# Altium PCB Filter_v2.PcbDoc
Units mil, origin at the board's own origin, x right, y up, seen from the top; angles counter-clockwise.
Board outline 950 x 885 mil, 2 copper layers (Top Layer, Bottom Layer); 29 components, 17 nets, 75 pads, 19 vias.
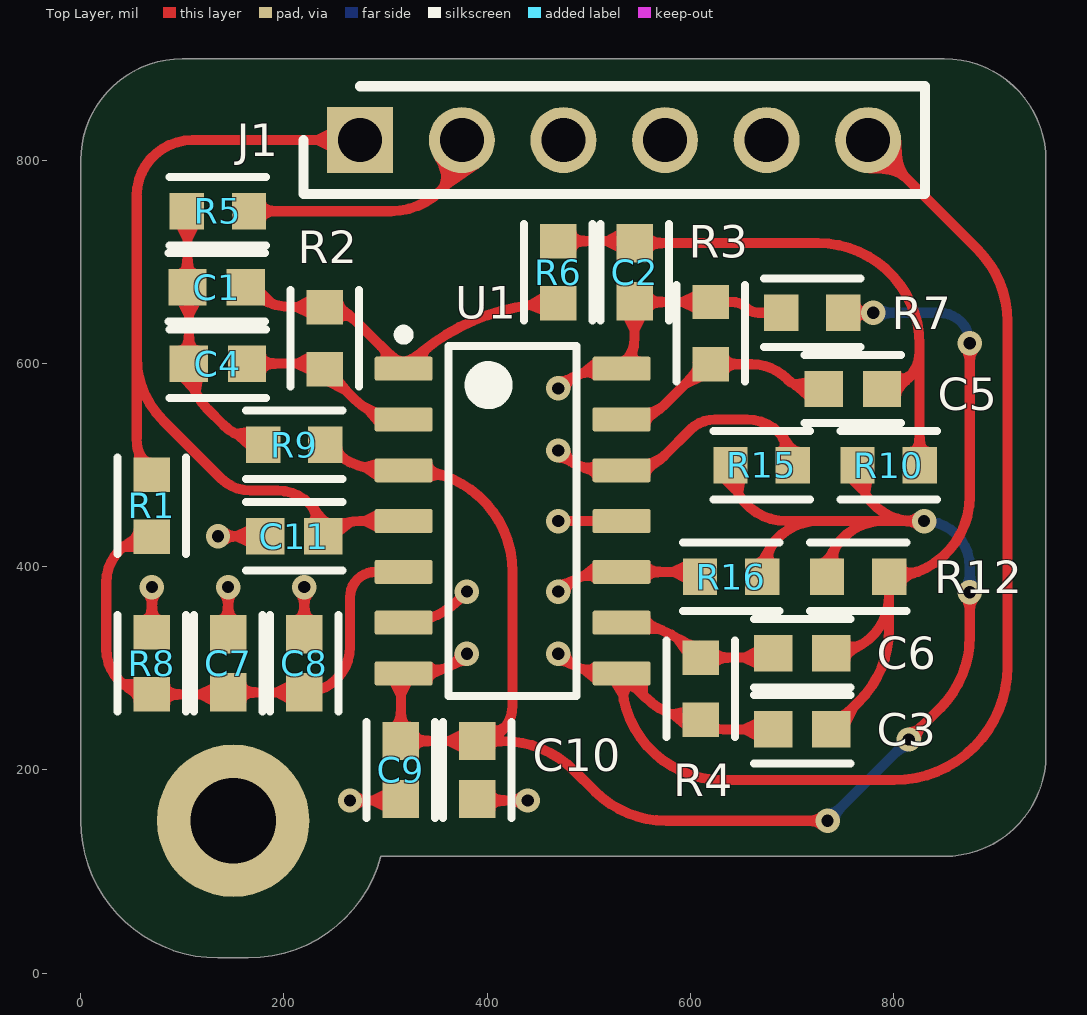
[diagram p0: Top Layer view]
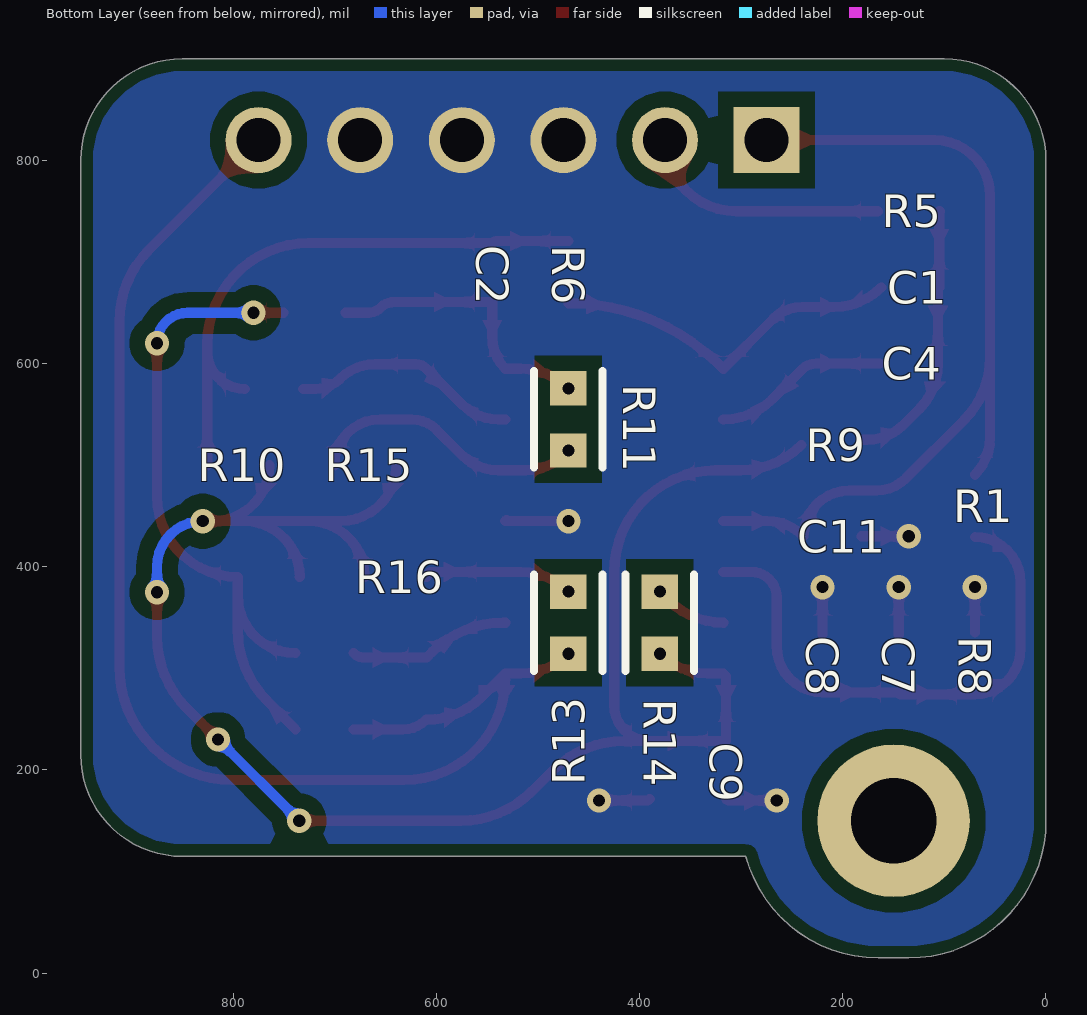
[diagram p1: Bottom Layer view, seen from below]
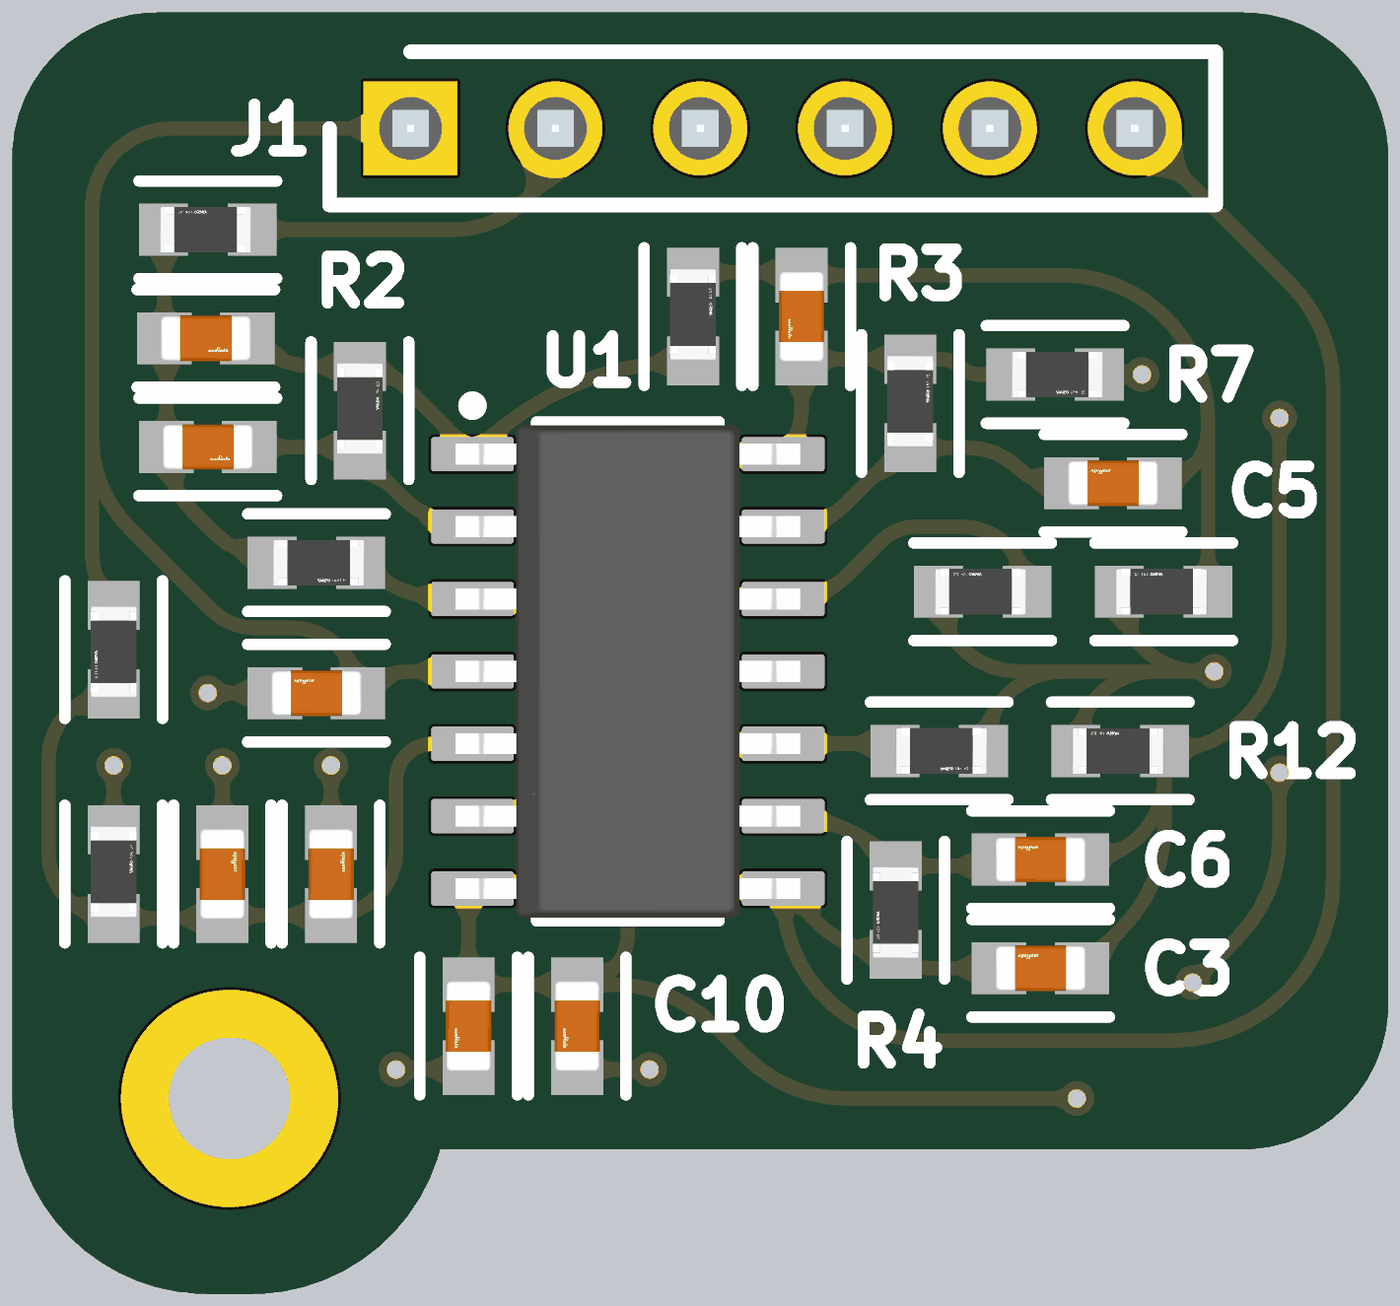
[diagram p2: 3D render of the assembled board from above, using the file's embedded part models]
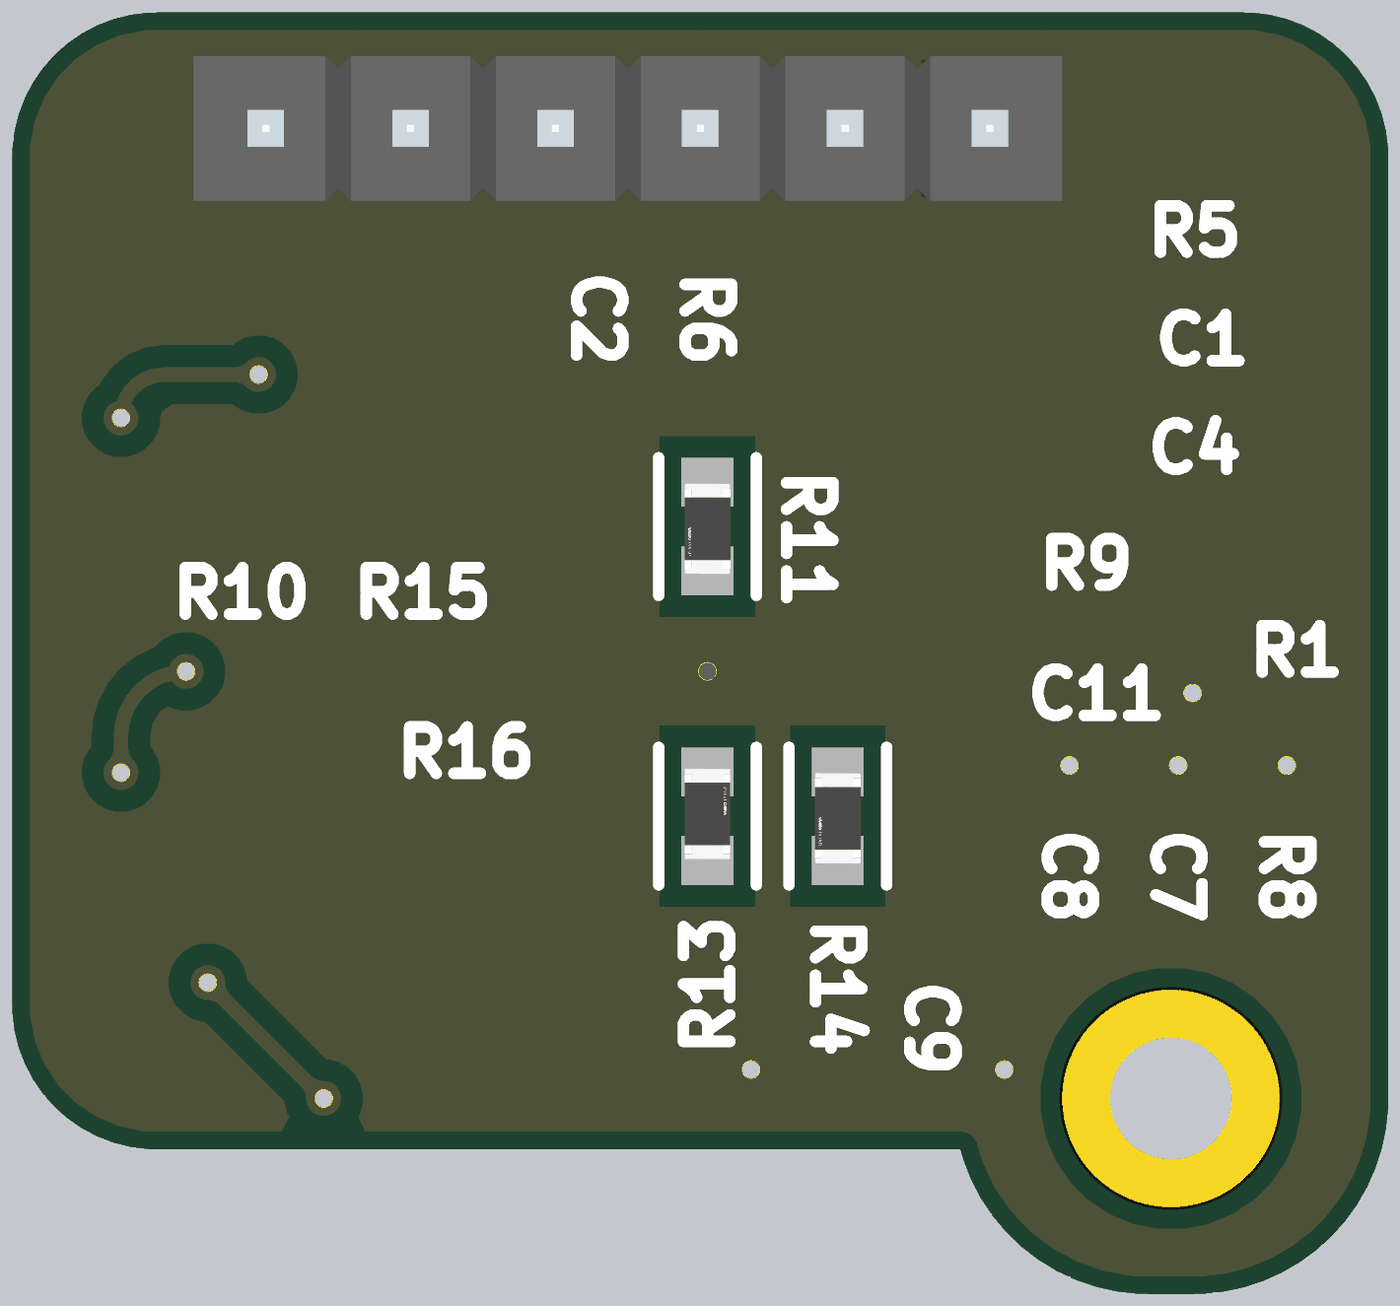
[diagram p3: 3D render of the assembled board from below, using the file's embedded part models]

## Layer stack, top to bottom
Top Solder: solder mask 0.4, Solder Resist, Dk 3.5
Top Layer: signal copper 1.4
Dielectric 1: dielectric 12.6, FR-4, Dk 4.8
Bottom Layer: signal copper 1.4
Bottom Solder: solder mask 0.4, Solder Resist, Dk 3.5

## Board outline
335,115.03 295.36,114.9 cw(c165,150) 165,15 135,15 cw(c135,150) 0,150 0,800 cw(c100,800) 100,900 850,900 cw(c850,800) 950,800 950,215 cw(c850,215) 850,115

## Design rules (kind name [scope] priority, off if disabled: settings)
BoardOutlineClearance [All] p1: gap=12 ignorepadtopadclearanceinfootprint=FALSE
Clearance [All] p1: gap=15 ignorepadtopadclearanceinfootprint=TRUE
PolygonConnect PolygonConnect_1 [OnLayer('Bottom Layer')] p1: connectstyle=Direct reliefconductorwidth=10 reliefentries=4 polygonreliefangle="90 Angle" airgapwidth=10
PolygonConnect [All] p2: thpad.connectstyle=Relief thpad.reliefconductorwidth=10 thpad.reliefentries=4 thpad.polygonreliefangle="90 Angle" thpad.airgapwidth=10 smdpad.connectstyle=Relief smdpad.reliefconductorwidth=10 smdpad.reliefentries=4 smdpad.polygonreliefangle="90 Angle" smdpad.airgapwidth=10 via.connectstyle=Direct via.reliefconductorwidth=10 via.reliefentries=4 via.polygonreliefangle="90 Angle" via.airgapwidth=10
RoutingVias [All] p1: holewidth=24 width=48 viastyle="Through Hole" minholewidth=12 minwidth=24 maxholewidth=48 maxwidth=96
SolderMaskExpansion SolderMaskExpansion_1 [IsVia] p1: expansion=4 istentingtop=TRUE
SolderMaskExpansion [All] p2: expansion=1.97 istentingtop=FALSE
SupplyNets "Schematic Supply Nets_1" [InNet('+3V3')] p1: voltage=0.000
SupplyNets "Schematic Supply Nets" [InNet('GND')] p2: voltage=0.000
Width [All] p1: maxlimit=40 minlimit=10 preferedwidth=20
30 further rules are at their usual default settings.

## Components (designator, comment, footprint, x,y, rotation, side; value= is the part's Value field where it differs from the comment)
C1 "360pF" FP-GCM188-0_1-IPC_B 133.61,675 r0 top
C2 "330pF" FP-GCM188-0_1-IPC_B 545,690 r270 top
C3 "360pF" FP-GCM188-0_1-IPC_B 710,240 r180 top
C4 "360pF" FP-GCM188-0_1-IPC_B 135,600 r0 top
C5 "330pF" FP-GCM188-0_1-IPC_B 760,575 r180 top
C6 "360pF" FP-GCM188-0_1-IPC_B 710,315 r180 top
C7 "10uF" FP-GCM188-0_1-IPC_B 145,305 r90 top
C8 "100nF" FP-GCM188-0_1-IPC_B 220,305 r90 top
C9 "10uF" FP-GCM188-0_1-IPC_B 315,200 r270 top
C10 "100nF" FP-GCM188-0_1-IPC_B 390,200 r270 top
C11 "100nF" FP-GCM188-0_1-IPC_B 210,430 r180 top
J1 "61300611121" 61300611121-Footprint-1 275,820 r0 top
R1 "10k" FP-RT0603-IPC_B 70,460 r270 top value=10kR
R2 "165k" FP-RT0603-IPC_B 240,625 r90 top value=165kR
R3 "102k" FP-RT0603-IPC_B 620,630 r90 top value=102kR
R4 "102k" FP-RT0603-IPC_B 610,280 r270 top value=102kR
R5 "82.5k" FP-RT0603-IPC_B 135,750 r180 top value=82.5kR
R6 "80.6k" FP-RT0603-IPC_B 470,690 r90 top value=80.6kR
R7 "80.6k" FP-RT0603-IPC_B 720,650 r0 top value=80.6kR
R8 "10k" FP-RT0603-IPC_B 70,305 r90 top value=10kR
R9 "576R" FP-RT0603-IPC_B 210,520 r0 top
R10 "1.05k" FP-RT0603-IPC_B 795,500 r180 top value=1.05kR
R11 "14.3k" FP-RT0603-IPC_B 470,545 r270 bottom value=14.3kR
R12 "1.05k" FP-RT0603-IPC_B 765,390 r180 top value=1.05kR
R13 "14.7k" FP-RT0603-IPC_B 470,345 r90 bottom value=14.7kR
R14 "4.99k" FP-RT0603-IPC_B 380,345 r270 bottom value=4.99kR
R15 "154R" FP-RT0603-IPC_B 670,500 r180 top
R16 "158R" FP-RT0603-IPC_B 640,390 r0 top
U1 "TL974IDR" D0014A_N 425,445 r0 top

## Footprints (in the part's own frame and the unit in brackets; to place one, negate y for a bottom-side part, rotate by r counter-clockwise, add the part's x,y. Pads: shape width x height; smd on the part's side, far side on the other; paste and mask are expansions set on the pad)
61300611121-Footprint-1 [mm]
  rect 1.65x1.65 hole 1.1: 1(0,0)
  round 1.65 hole 1.1: 2(2.54,0) 3(5.08,0) 4(7.62,0) 5(10.16,0) 6(12.7,0)
  silkscreen extent -1.42,-1.35 14.12,1.35, body extent -1.27,-1.27 13.97,1.27, height 2.74
D0014A_N [mm] "SOIC, 14-Leads, Body 8.75x4mm, Pitch 1.27mm, IPC Medium Density"
  rrect17% 1.45x0.6 smd: 1(-2.725,3.81) 2(-2.725,2.54) 3(-2.725,1.27) 4(-2.725,0) 5(-2.725,-1.27) 6(-2.725,-2.54) 7(-2.725,-3.81) 8(2.725,-3.81) 9(2.725,-2.54) 10(2.725,-1.27) 11(2.725,0) 12(2.725,1.27) 13(2.725,2.54) 14(2.725,3.81)
  silkscreen extent -2.85,-4.38 1.6,4.78, body extent -3.02,-4.32 3.02,4.32, height 1.59
FP-GCM188-0_1-IPC_B [mil]
  rect 37.74x35.91 smd paste+0 mask+0: 1(-28.61,0) 2(28.61,0)
  silkscreen extent -47,-34 47,34, body extent -57,-28 57,28, height 10
FP-RT0603-IPC_B [mil]
  rect 33.81x35.91 smd paste+0 mask+0: 1(-30.58,0) 2(30.58,0)
  silkscreen extent -47,-34 47,34, body extent -57,-28 57,28, height 10

## Part data
C1 C3 C4 C6: library part CMP-00016-1, "Ceramic Capacitor, Multilayer, Ceramic, 100V, 1% +Tol, 1% -Tol, C0G, 30ppm/Cel TC, 0.00036uF, Surface Mount, 0603", Capacitor Type=Ceramic, Case/Package=0603, Max Operating Temperature=125°C, Min Operating Temperature=-55°C, Package Shape=Rectangular, Rated DC Voltage (URdc)=100V, Temperature Characteristics Code=C0G, Tolerance  (fill in as +-)=1%, Dielectric Material=Ceramic, Mounting Technology="Surface Mount", Multilayer=Yes, Packaging="Tape and Reel", Pins=2, Reach SVHC Compliant=Yes, Reference Standard=AEC-Q200, RoHS Compliant=Yes, Termination=Wraparound, Tolerance (fill in as +-)=1%
C2 C5: library part CMP-00012-1, "Ceramic Capacitor, Multilayer, Ceramic, 50V, 1% +Tol, 1% -Tol, C0G, -/+30ppm/Cel TC, 0.00033uF, Surface Mount, 0603", Capacitor Type=Ceramic, Case/Package=0603, Manufacturer Series=GRM18, Max Operating Temperature=125°C, Min Operating Temperature=-55°C, Package Shape=Rectangular, Rated DC Voltage (URdc)=50V, Temperature Characteristics Code=C0G, Tolerance  (fill in as +-)=1%, Dielectric Material=Ceramic, JESD-609 Code=e3, Mounting Technology="Surface Mount", Multilayer=Yes, Packaging="Tape and Reel", Pins=2, Reach SVHC Compliant=Yes, RoHS Compliant=Yes, Terminal Finish=Tin, Termination=Wraparound, Tolerance (fill in as +-)=1%
C7 C9: library part CMP-00036-2, "25V 10uF Ceramic Capacitor, Multilayer, Ceramic, 25V, 10% +Tol, 10% -Tol, X5R, 15% TC, 10uF, Surface Mount, 0603", Capacitor Type=Ceramic, Case/Package=0603, Max Operating Temperature=85°C, Min Operating Temperature=-55°C, Package Shape=Rectangular, Rated DC Voltage (URdc)=25V, Temperature Characteristics Code=X5R, Tolerance  (fill in as +-)=10%, Dielectric Material=Ceramic, JESD-609 Code=e3, Mounting Technology="Surface Mount", Multilayer=Yes, Packaging="Tape and Reel", Pins=2, Reach SVHC Compliant=Yes, RoHS Compliant=Yes, Terminal Finish=Nickel, Termination=Wraparound, Tolerance (fill in as +-)=10%
C8 C10 C11: library part CMP-00033-2, "50V 100nF Ceramic Capacitor, Multilayer, Ceramic, 50V, 10% +Tol, 10% -Tol, X7R, 15% TC, 0.1uF, Surface Mount, 0603", Capacitor Type=Ceramic, Case/Package=0603, Max Operating Temperature=125°C, Min Operating Temperature=-55°C, Package Shape=Rectangular, Package Style=SMTMeter, Rated DC Voltage (URdc)=50V, Temperature Characteristics Code=X7R, Tolerance  (fill in as +-)=10%, Dielectric Material=Ceramic, Height=0.8mm, JESD-609 Code=e3, Length=1.6mm, Mounting Technology="Surface Mount", Multilayer=Yes, Packaging="Tape and Reel", Pins=2, Reach SVHC Compliant=Yes, RoHS Compliant=Yes, Terminal Finish=Nickel, Termination=Wraparound, Tolerance (fill in as +-)=10%, Width=0.8mm
J1: library part CMP-00041-2, "6P Single Row 2.54mm Wurth Elektronik Header Pin (inverted 3D model)", Contact Resistance=20mR, Dielectric Withstanding Voltage (AC)=500V, Insulation Color=Black, Insulation Resistance=1GR, Max Operating Temperature=125°C, Min Operating Temperature=-40°C, Rated Current (Signal)=3A, Body Breadth=0.1inch, Body Depth=0.1inch, Body Length=0.6inch, Body/Shell Style=PLUG, Connector Type="BOARD CONNECTOR", Contact Finish - Mating=GOLD, Contact Finish - Termination="Gold (Au) - with Nickel (Ni) barrier", Contact Gender=Male, Contact Material="Copper Alloy", Contact Pattern=RECTANGULAR, Contact Style="SQ PIN-SKT", Insulation Material=Polybutylene, JESD-609 Code=e4, Mating Contact Pitch=0.1inch, Mounting Option 1=LOCKING, Mounting Style=STRAIGHT, Mounting Technology=Board, Number Of Connectors=1, Number of Contacts=6, Number of Rows Loaded=1, PCB Contact Pattern=RECTANGULAR, Reach SVHC Compliant=Yes, Reference Standard=UL, Reliability=COMMERCIAL, RoHS Compliant=Yes, System=Connector, Terminal Length=0.118inch, Terminal Pitch=2.54mm, Termination=Solder
R1 R8: library part CMP-00035-1, "10k 1% Fixed Resistor, Metal Glaze/thick Film, 0.1W, 10000ohm, 75V, 1% +/-Tol, 100ppm/Cel, Surface Mount, 0603", Case/Package=0603, Max Operating Temperature=155°C, Min Operating Temperature=-55°C, Package Height=0.45mm, Package Length=1.6mm, Package Shape=Rectangular, Package Width=0.8mm, Power=100mW, Rated Temperature=70°C, Resistor Type="FIXED RESISTOR", Temperature Coefficient (ppm/Cel)=100, Tolerance=1%, Working Voltage=75V, Additional Feature="LASER TRIMMABLE", Construction=Chip, JESD-609 Code=e3, Mounting Technology="Surface Mount", Packaging="Tape and Reel", Pins=2, Reach SVHC Compliant=Yes, RoHS Compliant=Yes, Technology="METAL GLAZE/THICK FILM", Terminal Finish=Nickel, Termination=Wraparound
R2: library part CMP-00023-1, "165k Fixed Resistor, Thin Film, 0.1W, 165000ohm, 75V, 0.1% +/-Tol, 25ppm/Cel, Surface Mount, 0603", Case/Package=0603, Max Operating Temperature=155°C, Min Operating Temperature=-55°C, Package Height=0.45mm, Package Length=1.6mm, Package Width=0.8mm, Power=100mW, Rated Temperature=70°C, Resistor Type="FIXED RESISTOR", Temperature Coefficient (ppm/Cel)=25, Tolerance=0.1%, Working Voltage=75V, Construction=Chip, Mounting Technology="Surface Mount", Packaging="Tape and Reel", Pins=2, Reach SVHC Compliant=Yes, RoHS Compliant=Yes, Technology="THIN FILM", Termination=Wraparound
R3 R4: library part CMP-00011-2, "102k Fixed Resistor, Thin Film, 0.1W, 102000ohm, 75V, 0.1% +/-Tol, 25ppm/Cel, Surface Mount, 0603", Case/Package=0603, Max Operating Temperature=155°C, Min Operating Temperature=-55°C, Package Height=0.45mm, Package Length=1.6mm, Package Width=0.8mm, Power=100mW, Rated Temperature=70°C, Resistor Type="FIXED RESISTOR", Temperature Coefficient (ppm/Cel)=25, Tolerance=0.1%, Working Voltage=75V, Construction=Chip, Mounting Technology="Surface Mount", Packaging="Tape and Reel", Pins=2, Reach SVHC Compliant=Yes, RoHS Compliant=Yes, Technology="THIN FILM", Termination=Wraparound
R5: library part CMP-00022-2, "82.5k Fixed Resistor, Thin Film, 0.1W, 82500ohm, 75V, 0.1% +/-Tol, 25ppm/Cel, Surface Mount, 0603", Case/Package=0603, Max Operating Temperature=155°C, Min Operating Temperature=-55°C, Package Height=0.45mm, Package Length=1.6mm, Package Width=0.8mm, Power=100mW, Rated Temperature=70°C, Resistor Type="FIXED RESISTOR", Temperature Coefficient (ppm/Cel)=25, Tolerance=0.1%, Working Voltage=75V, Construction=Chip, Mounting Technology="Surface Mount", Packaging="Tape and Reel", Pins=2, Reach SVHC Compliant=Yes, RoHS Compliant=Yes, Technology="THIN FILM", Termination=Wraparound
R6 R7: library part CMP-00025-2, "80.6k Fixed Resistor, Thin Film, 0.1W, 80600ohm, 75V, 0.1% +/-Tol, 25ppm/Cel, Surface Mount, 0603", Case/Package=0603, Max Operating Temperature=155°C, Min Operating Temperature=-55°C, Package Height=0.45mm, Package Length=1.6mm, Package Width=0.8mm, Power=100mW, Rated Temperature=70°C, Resistor Type="FIXED RESISTOR", Temperature Coefficient (ppm/Cel)=25, Tolerance=0.1%, Working Voltage=75V, Construction=Chip, Mounting Technology="Surface Mount", Packaging="Tape and Reel", Pins=2, Reach SVHC Compliant=Yes, RoHS Compliant=Yes, Technology="THIN FILM", Termination=Wraparound
R9: library part CMP-00024-2, "576R Fixed Resistor, Thin Film, 0.1W, 576ohm, 75V, 0.1% +/-Tol, 25ppm/Cel, Surface Mount, 0603", Case/Package=0603, Max Operating Temperature=155°C, Min Operating Temperature=-55°C, Package Height=0.45mm, Package Length=1.6mm, Package Width=0.8mm, Power=100mW, Rated Temperature=70°C, Resistor Type="FIXED RESISTOR", Temperature Coefficient (ppm/Cel)=25, Tolerance=0.1%, Working Voltage=75V, Construction=Chip, Mounting Technology="Surface Mount", Packaging="Tape and Reel", Pins=2, Reach SVHC Compliant=Yes, RoHS Compliant=Yes, Technology="THIN FILM", Termination=Wraparound
R10 R12: library part CMP-00026-2, "1.05k Fixed Resistor, Thin Film, 0.1W, 1050ohm, 75V, 0.1% +/-Tol, 25ppm/Cel, Surface Mount, 0603", Case/Package=0603, Max Operating Temperature=155°C, Min Operating Temperature=-55°C, Package Height=0.45mm, Package Length=1.6mm, Package Width=0.8mm, Power=100mW, Rated Temperature=70°C, Resistor Type="FIXED RESISTOR", Temperature Coefficient (ppm/Cel)=25, Tolerance=0.1%, Working Voltage=75V, Construction=Chip, Mounting Technology="Surface Mount", Packaging="Tape and Reel", Pins=2, Reach SVHC Compliant=Yes, RoHS Compliant=Yes, Technology="THIN FILM", Termination=Wraparound
R11: library part CMP-00029-1, "14.3k Fixed Resistor, Thin Film, 0.1W, 14300ohm, 75V, 0.1% +/-Tol, 25ppm/Cel, Surface Mount, 0603", Case/Package=0603, Max Operating Temperature=155°C, Min Operating Temperature=-55°C, Package Height=0.45mm, Package Length=1.6mm, Package Width=0.8mm, Power=100mW, Rated Temperature=70°C, Resistor Type="FIXED RESISTOR", Temperature Coefficient (ppm/Cel)=25, Tolerance=0.1%, Working Voltage=75V, Construction=Chip, Mounting Technology="Surface Mount", Packaging="Tape and Reel", Pins=2, Reach SVHC Compliant=Yes, RoHS Compliant=Yes, Technology="THIN FILM", Termination=Wraparound
R13: library part CMP-00027-2, "14.7k Fixed Resistor, Thin Film, 0.1W, 14700ohm, 75V, 0.1% +/-Tol, 25ppm/Cel, Surface Mount, 0603", Case/Package=0603, Max Operating Temperature=155°C, Min Operating Temperature=-55°C, Package Height=0.45mm, Package Length=1.6mm, Package Width=0.8mm, Power=100mW, Rated Temperature=70°C, Resistor Type="FIXED RESISTOR", Temperature Coefficient (ppm/Cel)=25, Tolerance=0.1%, Working Voltage=75V, Construction=Chip, Mounting Technology="Surface Mount", Packaging="Tape and Reel", Pins=2, Reach SVHC Compliant=Yes, RoHS Compliant=Yes, Technology="THIN FILM", Termination=Wraparound
R14: library part CMP-00037-1, "4.99k 1% Fixed Resistor, Metal Glaze/thick Film, 0.1W, 4990ohm, 75V, 1% +/-Tol, 100ppm/Cel, Surface Mount, 0603", Case/Package=0603, Max Operating Temperature=155°C, Min Operating Temperature=-55°C, Package Height=0.45mm, Package Length=1.6mm, Package Shape=Rectangular, Package Width=0.8mm, Power=100mW, Rated Temperature=70°C, Resistor Type="FIXED RESISTOR", Temperature Coefficient (ppm/Cel)=100, Tolerance=1%, Working Voltage=75V, Additional Feature="LASER TRIMMABLE", Construction=Chip, JESD-609 Code=e3, Mounting Technology="Surface Mount", Packaging="Tape and Reel", Pins=2, Reach SVHC Compliant=Yes, RoHS Compliant=Yes, Technology="METAL GLAZE/THICK FILM", Terminal Finish=Nickel, Termination=Wraparound
R15: library part CMP-00030-1, "154R Fixed Resistor, Thin Film, 0.1W, 154ohm, 75V, 0.1% +/-Tol, 25ppm/Cel, Surface Mount, 0603", Case/Package=0603, Max Operating Temperature=155°C, Min Operating Temperature=-55°C, Package Height=0.45mm, Package Length=1.6mm, Package Width=0.8mm, Power=100mW, Rated Temperature=70°C, Resistor Type="FIXED RESISTOR", Temperature Coefficient (ppm/Cel)=25, Tolerance=0.1%, Working Voltage=75V, Construction=Chip, Mounting Technology="Surface Mount", Packaging="Tape and Reel", Pins=2, Reach SVHC Compliant=Yes, RoHS Compliant=Yes, Technology="THIN FILM", Termination=Wraparound
R16: library part CMP-00028-2, "158R Fixed Resistor, Thin Film, 0.1W, 158ohm, 75V, 0.1% +/-Tol, 25ppm/Cel, Surface Mount, 0603", Case/Package=0603, Max Operating Temperature=155°C, Min Operating Temperature=-55°C, Package Height=0.45mm, Package Length=1.6mm, Package Width=0.8mm, Power=100mW, Rated Temperature=70°C, Resistor Type="FIXED RESISTOR", Temperature Coefficient (ppm/Cel)=25, Tolerance=0.1%, Working Voltage=75V, Construction=Chip, Mounting Technology="Surface Mount", Packaging="Tape and Reel", Pins=2, Reach SVHC Compliant=Yes, RoHS Compliant=Yes, Technology="THIN FILM", Termination=Wraparound
U1: library part CMP-00044-1, "Operational Amplifier, 4 Func, 6000uV Offset-Max, BIPolar, PDSO14", Average Bias Current-Max (IIB)=1uA, Bias Current-Max (IIB) @25C=750nA, Case/Package=SOP, Frequency Compensation=YES, Input Offset Voltage-Max=6mV, Max Operating Temperature=125°C, Max Supply Current=12.8mA, Min Operating Temperature=-40°C, Neg Supply Voltage-Nom (Vsup)=-2.5V, Nominal Supply Voltage=2.5V, Package Body Material=Plastic, Package Equivalence Code=SOP14,.25, Package Shape=Rectangular, Package Style="SMALL OUTLINEMeter", Peak Reflow Temperature (Cel)=260°C, Power Supplies=+-2.5V, Supply Voltage Limit-Max=15V, Temperature Grade=AUTOMOTIVE, Voltage Gain-Min=3160, Amplifier Type="OPERATIONAL AMPLIFIER", Architecture=VOLTAGE-FEEDBACK, Channels=4, Common-mode Reject Ratio-Nom=85dB, Height - Seated (Max)=1.75mm, JESD-30 Code=R-PDSO-G14, JESD-609 Code=e4, Length=8.65mm, Low-Offset=No, Moisture Sensitivity Level=1, Packaging="Tape and Reel", Pins=14, Qualification Status="Not Qualified", Reach SVHC Compliant=Yes, RoHS Compliant=Yes, Slew Rate=5V/µs, Slew Rate-Min=3.5V/µs, Surface Mount=Yes, Technology=BIPOLAR, Terminal Finish=Nickel, Terminal Form="Gull Wing", Terminal Pitch=1.27mm, Terminal Position=DUAL, Unity Gain BW-Nom=12MHz, Width=3.9mm

## Free pads (board coordinates)
  round 150 hole 84: 1(150,150)

## Via types
v1: diameter 24, hole 12, Top Layer to Bottom Layer, tented both sides, 19 vias

## Nets (pads, with @x,y where several pads share a name; then routed paths per layer and width w, separated by ;. In a path a pad name is that pad's centre, name@x,y a point inside that pad or via, vN(x,y) a via of type N, cw(c..) or ccw(c..) an arc to the next point about the centre after c; other vN are vias at no path point)
+3V3: C11.1 J1.1 R1.1 U1.4 | length 892.3
  Top Layer w10: R1.1 cw(c106.21,526.79) 55,526.79 55,606.28 ; J1.1 109.95,820 ccw(c109.95,765.05) 55,765.05 55,606.28 ; U1.4 274.82,445 ccw(c274.82,393.79) C11.1 236.71,442.96 ccw(c193.61,430) 193.61,475 167.13,475 167.07,475 cw(c167.07,516.21) 137.93,487.07 137.89,487.11 80.66,544.34 cw(c142.59,606.28) 55,606.28
GND: C7.2 C8.2 C9.2 C10.2 C11.2 J1.3 J1.4 J1.5 R8.2 U1.11 | length 348.2
  Top Layer w10: R8.2 v1(70,380) ; v1(135,430) C11.2 ; C7.2 v1(145,380) ; C8.2 v1(220,380) ; v1(265,170) 311.65,170 ccw(c311.65,174.74) C9.2 ; C10.2 ccw(c393.35,174.74) 393.35,170 v1(440,170) ; v1(470,445) U1.11 U1.11@531.13,446.15
NetC1_1: C1.1 C4.1 R5.2 R9.1 | length 266
  Top Layer w10: R5.2 105,750 C1.1 cw(c105,673.61) 106.39,673.61 C4.1 ccw(c170.1,600) 125.05,554.95 140,540 ccw(c176.21,576.21) 176.21,525 R9.1@179.42,525
NetC1_2: C1.2 R2.2 R6.1 U1.1 | length 353.8
  Top Layer w10: C1.2 ccw(c209.11,721.89) 209.11,655.58 R2.2 cw(c240,614.21) 269.26,643.46 U1.1 324.67,601.81 cw(c470,447.3) R6.1@457.04,659.03 ; R6.1@457.04,659.02 R6.1
NetC2_1: C2.1 C5.1 R6.2 R10.1 | length 589.9
  Top Layer w10: R6.2 540.25,720.58 cw(c540.25,713.86) C2.1 725.58,718.61 cw(c725.58,618.61) 825.58,618.61 825.58,611.97 ; C5.1 ccw(c788.61,611.97) 825.58,611.97 ; R10.1 825.58,611.97
NetC2_2: C2.2 R3.2 R7.1 R11.1 U1.14 | length 284.7
  Top Layer w10: v1(470,575.58) cw(c516.89,528.69) 516.89,595 U1.14 ccw(c501.58,625.7) 545,625.7 C2.2 ccw(c546.96,663.35) 546.96,660.58 R3.2 641.53,660.58 cw(c641.53,641.53) 655,655 ccw(c667.07,667.07) 667.07,650 R7.1
NetC3_1: C3.1 C6.1 R7.2 R12.1 | length 675.7
  Top Layer w10: C3.1 766.29,267.68 ccw(c695.58,338.39) 795.58,338.39 795.58,371.97 ; C6.1 ccw(c738.61,371.97) 795.58,371.97 ; R7.2 v1(780,650) ; v1(875,620) 875,469.42 cw(c795.58,469.42) R12.1 795.58,371.97
  Bottom Layer w10: v1(780,650) 845,650 cw(c845,620) v1(875,620)
NetC3_2: C3.2 J1.6 R4.2 R13.1 U1.8 | length 1306
  Top Layer w10: v1(470,314.42) ccw(c516.89,361.31) 516.89,295 U1.8 555.14,272.15 ccw(c610,327.01) R4.2 ccw(c632.74,272.17) 632.74,240 C3.2 ; U1.8@532.28,290 ccw(c632.28,290) 632.28,190 800.39,190 ccw(c800.39,301.61) 912,301.61 912,641.58 ccw(c812,641.58) 882.71,712.29 J1.6
NetC4_2: C4.2 R2.1 U1.2 | length 173.1
  Top Layer w10: C4.2 226.53,600 cw(c226.53,580.95) R2.1 269.41,565.01 ccw(c317.72,613.31) U1.2
NetC5_2: C5.2 R3.1 U1.13 | length 225.4
  Top Layer w10: U1.13 538.79,545 ccw(c538.79,596.21) 574.99,559.99 610.48,595.48 cw(c620,585.95) R3.1 660.18,599.42 cw(c660.18,550.18) 695,585 ccw(c719.14,609.14) 719.14,575 C5.2
NetC6_2: C6.2 R4.1 U1.9 | length 160.2
  Top Layer w10: U1.9 534.16,345 cw(c534.16,245) 604.87,315.71 R4.1 670.72,310.58 ccw(c670.72,325.67) C6.2
NetC7_1: C7.1 C8.1 R1.2 R8.1 U1.5 | length 543.8
  Top Layer w10: R1.2 ccw(c70,384.42) 25,384.42 25,319.42 ccw(c70,319.42) R8.1 143.03,274.42 ccw(c143.03,276.39) C7.1 C8.1 ccw(c220,321.39) 265,321.39 265,370 cw(c290,370) 290,395 U1.5
NetC9_1: C9.1 C10.1 R9.2 R10.2 R12.2 R14.2 R15.2 R16.2 U1.3 U1.7 | length 1865.2
  Top Layer w10: R9.2 ccw(c300.93,580.36) 300.93,495 U1.3 325,495 cw(c325,395) 425,395 425,263.61 cw(c390,263.61) C10.1 ; U1.7@315,292.28 C9.1 C10.1 ; U1.7 333.11,295 ccw(c333.11,361.31) v1(380,314.42) ; R15.2 ccw(c694.42,500) 694.42,445 725.58,445 ; R16.2 cw(c725.58,390) 725.58,445 ; R12.2 cw(c789.42,390) 789.42,445 ; v1(735,150) 576.42,150 cw(c576.42,250) 505.71,179.29 485.68,199.32 ccw(c414.97,128.61) 414.97,228.61 C10.1 ; R10.2 ccw(c819.42,500) v1@819.42,445 ; v1(815,230) 845.71,260.71 ccw(c775,331.42) 875,331.42 v1(875,375) ; v1(830,445) v1@819.42,445 ; 725.58,445 789.42,445 ; 789.42,445 v1@819.42,445
  Bottom Layer w10: v1(735,150) v1(815,230) ; v1(830,445) cw(c830,400) 875,400 v1(875,375)
NetJ1_2: J1.2 R5.1 | length 249.4
  Top Layer w10: R5.1 305,750 ccw(c305,820) J1.2
NetR11_2: R11.2 R15.1 U1.12 | length 279
  Top Layer w10: v1(470,514.42) 473.54,510.89 ccw(c511.89,549.24) 511.89,495 U1.12 538.79,495 ccw(c538.79,546.21) 574.99,509.99 600,535 cw(c624.14,510.86) 624.14,545 655.58,545 cw(c655.58,500) R15.1
NetR13_2: R13.2 R16.1 U1.10 | length 147.5
  Top Layer w10: v1(470,375.58) cw(c516.89,328.69) 516.89,395 U1.10 604.42,395 cw(c604.42,390) R16.1
NetR14_1: R14.1 U1.6 | length 71.7
  Top Layer w10: U1.6 ccw(c317.72,421.54) 371.84,367.42 v1(380,375.58)

## Polygon pours and split planes (outlines as drawn)
GND on Bottom Layer "BOTTOM_GND" (solid, pour order 1): 0,900 0,0 950,0 950,900